# Altium PCB PeSCA_PCB.PcbDoc
Units mil, origin at the board's own origin, x right, y up, seen from the top; angles counter-clockwise.
Board outline 1968.47 x 1968.47 mil, 2 copper layers (Top Layer, Bottom Layer), stack 61.756 mil thick; 61 components, 33 nets, 166 pads, 123 vias.
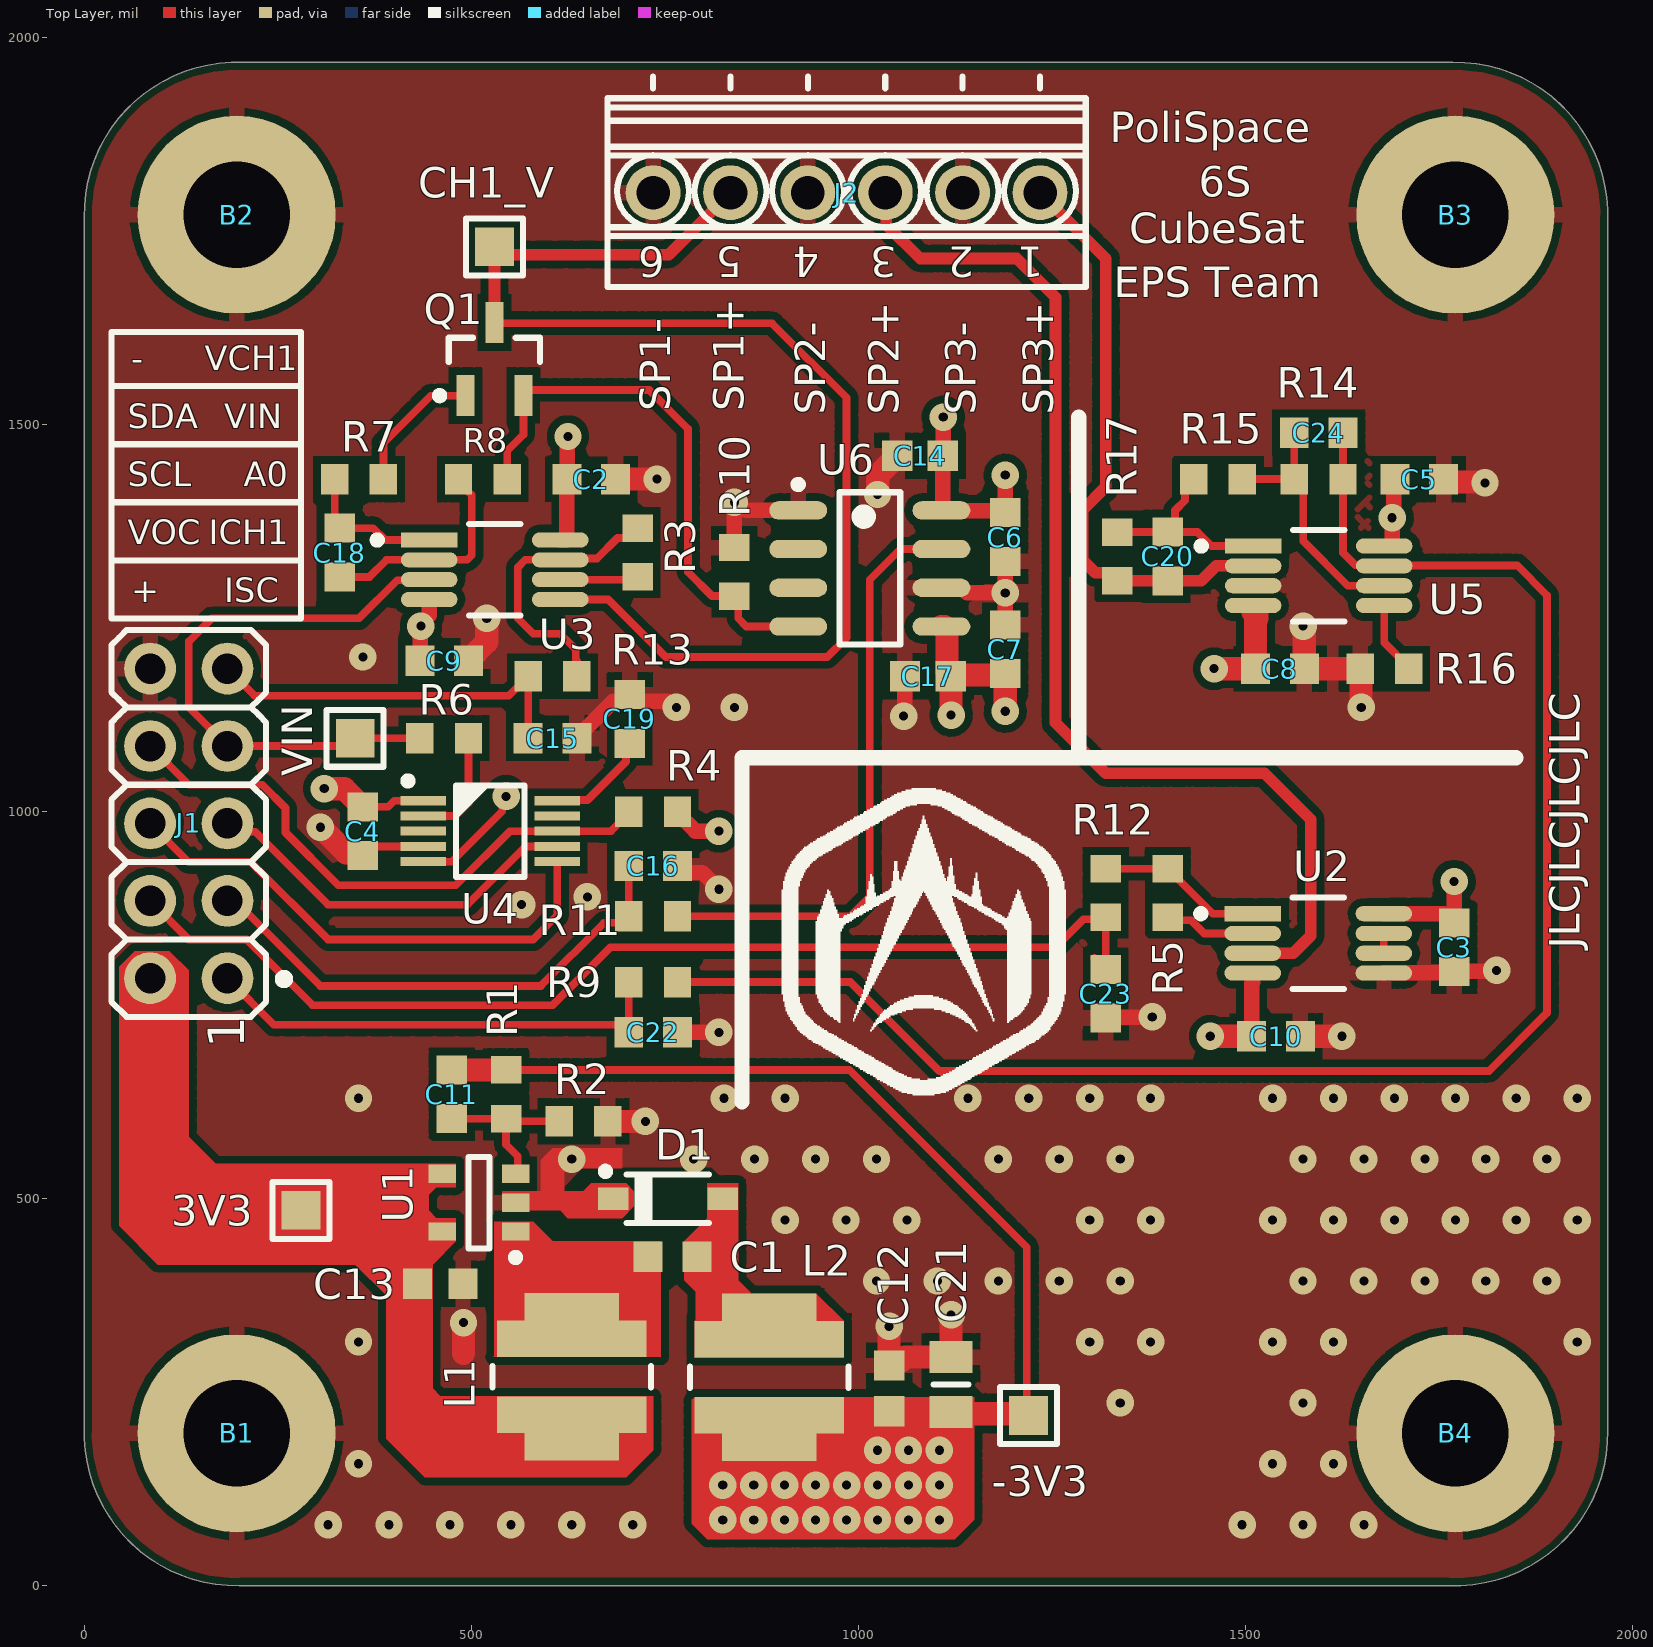
[diagram p0: Top Layer view]
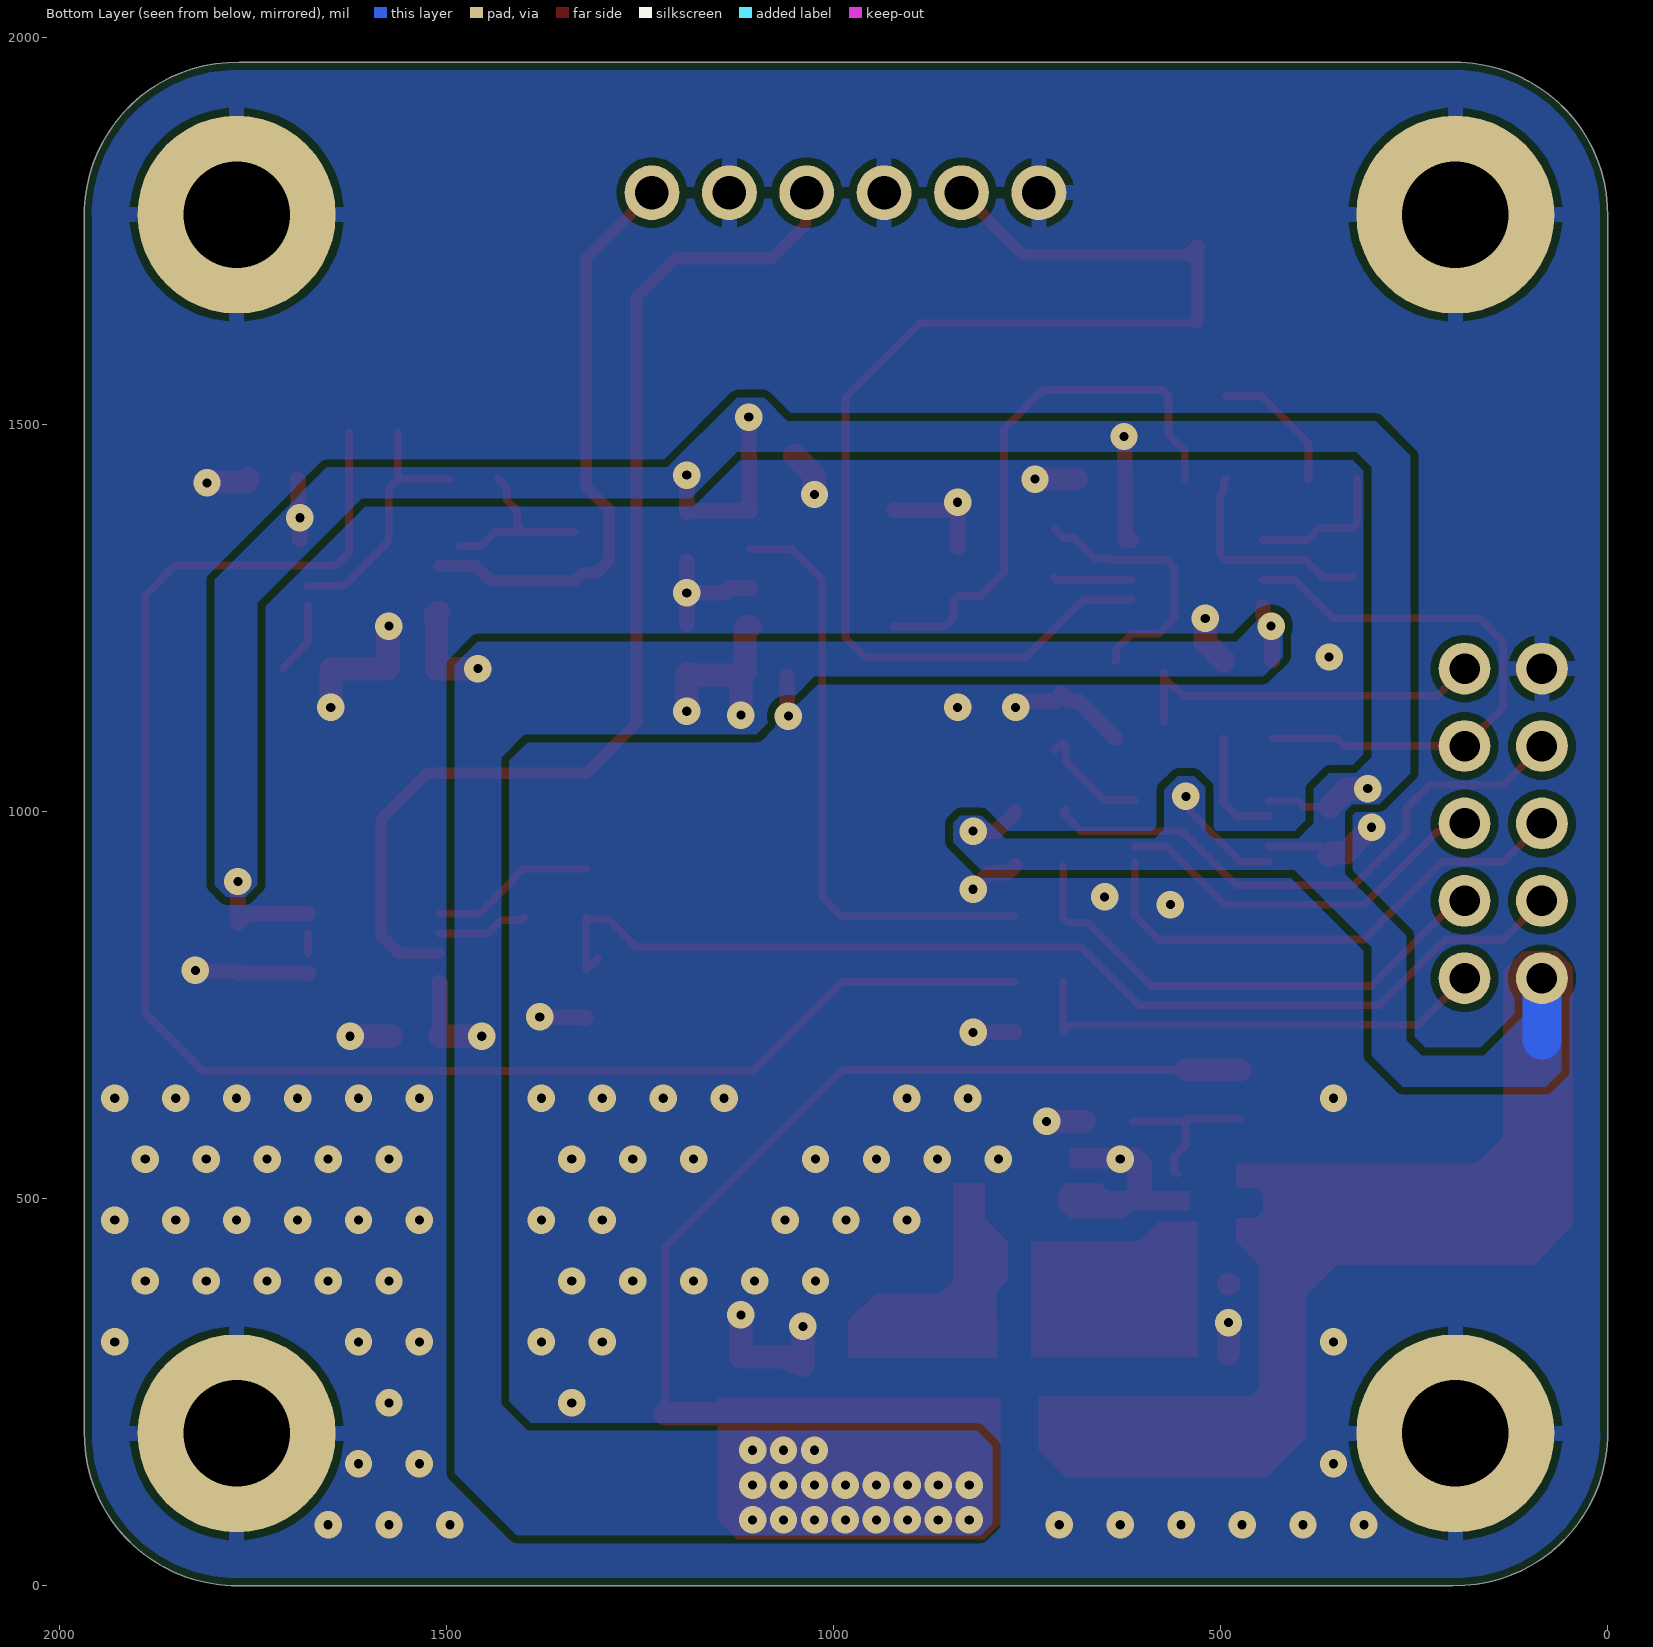
[diagram p1: Bottom Layer view, seen from below]
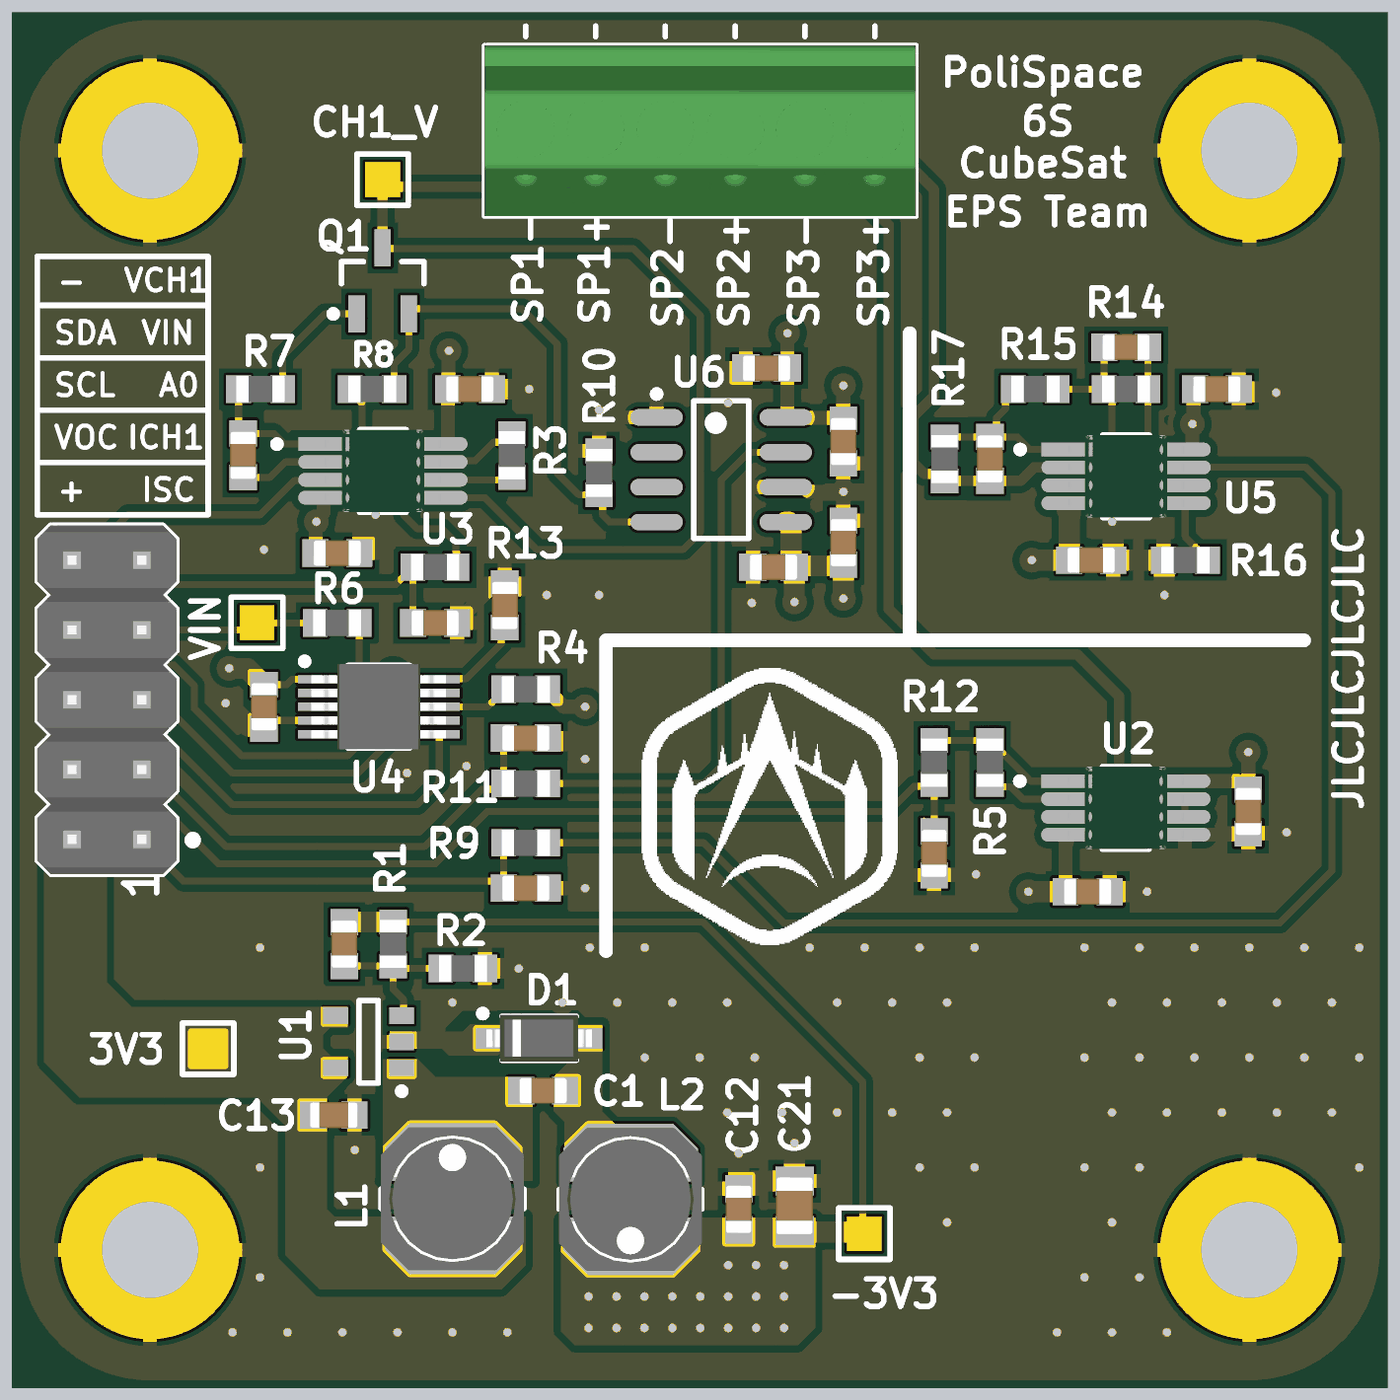
[diagram p2: 3D render of the assembled board from above, using the file's embedded part models]

## Layer stack, top to bottom
Top Solder: solder mask 0.4, Solder Resist, Dk 3.5
Top Layer: signal copper 1.378
Dielectric 2: core 59, Core-043, Dk 4.3
Bottom Layer: signal copper 1.378
Bottom Solder: solder mask 0.4, Solder Resist, Dk 3.5

## Board outline
200,0.02 cw(c196.85,196.85) 0.16,204.99 0.02,205.14 0.03,1768.52 cw(c196.84,1771.67) 204.98,1968.33 204.99,1968.34 205.14,1968.49 1768.5,1968.49 cw(c1771.65,1771.65) 1968.34,1763.51 1968.49,1763.37 1968.49,200 cw(c1771.65,196.85) 1763.51,0.16 1763.37,0.02

## Design rules (kind name [scope] priority, off if disabled: settings)
BoardOutlineClearance [All] p1: gap=10 ignorepadtopadclearanceinfootprint=FALSE except(0: Arc-SplitContinuation Track-SplitContinuation SMDPad-SplitContinuation THPad-SplitContinuation Via-SplitContinuation Fill-SplitContinuation Poly-SplitContinuation Region-SplitContinuation Text-SplitContinuation)
Clearance Exception [IsPad AND InComponentClass('Eccezioni')] p1: gap=10 ignorepadtopadclearanceinfootprint=FALSE except(0: SMDPad-Hole THPad-Hole Via-Hole Fill-Hole Poly-Hole Region-Hole Text-Hole; 5: Arc-Arc Arc-Track Arc-SMDPad Track-Track Track-SMDPad SMDPad-SMDPad; 12.99: Arc-Hole Track-Hole; 19.68: THPad-THPad)
Clearance [All] p2: gap=10 ignorepadtopadclearanceinfootprint=FALSE except(0: SMDPad-Hole THPad-Hole Via-Hole Fill-Hole Poly-Hole Region-Hole Text-Hole; 5: Arc-Arc Arc-Track Track-Track SMDPad-SMDPad; 12.99: Arc-Hole Track-Hole; 19.68: THPad-THPad)
HoleSize [All] p1: absolutevalues=TRUE maxlimit=236.22 minlimit=7.87 maxpercent=80.000 minpercent=20.000
MinimumAnnularRing [All] p1: minimumring=11.81
MinimumSolderMaskSliver [All] p1: minsoldermaskwidth=3.94
PlaneConnect [All] p1: pad.planeconnectstyle=Relief pad.reliefexpansion=20 pad.reliefentries=4 pad.reliefconductorwidth=10 pad.reliefairgap=10 via.planeconnectstyle=Direct via.reliefexpansion=20 via.reliefentries=4 via.reliefconductorwidth=10 via.reliefairgap=10
PolygonConnect [All] p1: thpad.connectstyle=Relief thpad.reliefconductorwidth=20 thpad.reliefentries=4 thpad.polygonreliefangle="90 Angle" thpad.airgapwidth=10 smdpad.connectstyle=Relief smdpad.reliefconductorwidth=20 smdpad.reliefentries=4 smdpad.polygonreliefangle="90 Angle" smdpad.airgapwidth=10 via.connectstyle=Direct via.reliefconductorwidth=20 via.reliefentries=4 via.polygonreliefangle="90 Angle" via.airgapwidth=10
RoutingVias [All] p1: holewidth=28 width=50 viastyle="Through Hole" minholewidth=28 minwidth=50 maxholewidth=28 maxwidth=50
SilkToSilkClearance [All] p1: silktosilkclearance=3.94
SilkToSolderMaskClearance [IsPad] p1: minsilkscreentomaskgap=3.15 clearancetoexposedcopper=TRUE
SolderMaskExpansion [All] p1: expansion=4 istentingtop=FALSE
Width [All] p1: maxlimit=100 minlimit=10 preferedwidth=30
25 further rules are at their usual default settings.

## Classes and differential pairs
component class Eccezioni: U1 U2 U3 U4 U5 U6

## Components (designator, comment, footprint, x,y, rotation, side; value= is the part's Value field where it differs from the comment)
3V3 "Test Point" TPS127 280,485 r0 top (schematic designator TP2)
-3V3 "Test Point" TPS127 1220,220 r0 top (schematic designator TP1)
B1 "Plated Hole" MTG350_650 196.85,196.85 r0 top
B2 "Plated Hole" MTG350_650 196.85,1771.65 r0 top
B3 "Plated Hole" MTG350_650 1771.65,1771.65 r0 top
B4 "Plated Hole" MTG350_650 1771.65,196.85 r0 top
C1 "470nF" CAPC1608X87N 760,425 r0 top
C2 "100nF" CAPC1608X87N 655,1430 r180 top
C3 "100nF" CAPC1608X87N 1770,825 r90 top
C4 "100nF" CAPC1608X87N 360,975 r90 top
C5 "100nF" CAPC1608X87N 1725,1430 r180 top
C6 "100nF" CAPC1608X87N 1190,1355 r90 top
C7 "100nF" CAPC1608X87N 1190,1210 r270 top
C8 "100nF" CAPC1608X87N 1545,1185 r180 top
C9 "100nF" CAPC1608X87N 465,1195 r180 top
C10 "100nF" CAPC1608X87N 1540,710 r180 top
C11 "100pF" CAPC1608X87N 475,635 r90 top
C12 "10uF" CAPC1608X80N 1040,255 r270 top
C13 "4.7uF" CAPC1709X95N 460,390 r180 top
C14 "10uF" CAPC1608X80N 1080,1460 r0 top
C15 "100pF" CAPC1608X87N 605,1095 r180 top
C16 "100pF" CAPC1608X87N 735,930 r180 top
C17 "10uF" CAPC1608X80N 1090,1175 r0 top
C18 "100nF" CAPC1608X87N 330,1335 r90 top
C19 "470nF" CAPC1608X87N 705,1120 r90 top
C20 "100nF" CAPC1608X87N 1400,1330 r270 top
C21 "10uF" CAPC2012X135N 1120,260 r270 top
C22 "470nF" CAPC1608X87N 735,715 r180 top
C23 "470nF" CAPC1608X87N 1320,765 r90 top
C24 "100nF" CAPC1608X87N 1595,1490 r180 top
CH1_V "Test Point" TPS127 530,1730 r0 top (schematic designator TP3)
D1 "MBR0520L-TP" SOD3715X135N 754.13,500 r0 top
J1 "Header 10" HARWIN_M20-9980546 135,985 r90 top
J2 "" PHOENIX_1725698 985,1800 r180 top
L1 "10uH" IND_TDK_VLCF5020-1 630,270 r90 top
L2 "10uH" IND_TDK_VLCF5020-1 885,269.21 r270 top
Q1 "BSS806N" INF-PG-SOT23_M 530,1585 r90 top
R1 "34k" RESC1608X55N 545,635 r90 top
R2 "21k" RESC1608X55N 645,600 r180 top
R3 "0" RESC1608X55N 715,1335 r90 top
R4 "4k7" RESC1608X55N 735,1000 r0 top
R5 "0" RESC1608X55N 1400,895 r90 top
R6 "0" RESC1608X55N 465,1095 r180 top
R7 "0" RESC1608X55N 355,1430 r0 top
R8 "0" RESC1608X55N 515,1430 r0 top
R9 "200" RESC1608X55N 735,780 r0 top
R10 "100" RESC1608X55N 840,1310 r270 top
R11 "200" RESC1608X55N 735,865 r0 top
R12 "200" RESC1608X55N 1320,895 r90 top
R13 "200" RESC1608X55N 605,1175 r0 top
R14 "21k" RESC1608X55N 1595,1430 r0 top
R15 "21k" RESC1608X55N 1465,1430 r0 top
R16 "10k" RESC1608X55N 1680,1185 r0 top
R17 "1k" RESC1608X55N 1335,1330 r90 top
U1 "LT1617ES5#TRMPBF" LT-S5-5-SOT-23_L 510,495 r180 top
U2 "OPA2202IDGKT" FP-DGK0008A-IPC_A 1594.53,830 r0 top
U3 "OPA2202IDGKT" FP-DGK0008A-IPC_A 530.32,1312.8 r0 top
U4 "DAC60501ZDGSR" SOP50P490X110-10N 524.53,975 r0 top
U5 "OPA2202IDGKT" FP-DGK0008A-IPC_A 1595,1305 r0 top
U6 "AD8228ARZ" ADI-R-8_L 1015,1314.53 r0 top
VIN "Test Point" TPS127 350,1095 r0 top (schematic designator TP4)

## Footprints (in the part's own frame and the unit in brackets; to place one, negate y for a bottom-side part, rotate by r counter-clockwise, add the part's x,y. Pads: shape width x height; smd on the part's side, far side on the other; paste and mask are expansions set on the pad)
ADI-R-8_L [mm] "SOIC, 8-Leads, Body 4.9x3.9mm, Pitch 1.27mm, IPC High Density"
  oval 1.9x0.6 smd: 1(-2.35,1.905) 2(-2.35,0.635) 3(-2.35,-0.635) 4(-2.35,-1.905) 5(2.35,-1.905) 6(2.35,-0.635) 7(2.35,0.635) 8(2.35,1.905)
  silkscreen extent -2.47,-2.5 1,2.88, body extent -2,-2.5 2,2.5, height 1.75
CAPC1608X80N [mm] "Chip Capacitor, Body 1.6x0.8mm IPC Medium Density"
  rect 1x1 smd: 1(-0.75,0) 2(0.75,0)
  body extent -0.87,-0.47 0.88,0.48, height 0.8
CAPC1608X87N [mm] "Chip Capacitor, Body 1.6x0.8mm IPC Medium Density"
  rect 0.95x1 smd: 1(-0.8,0) 2(0.8,0)
  body extent -0.87,-0.47 0.88,0.48, height 0.87
CAPC1709X95N [mm] "Capacitor, non-Polarized, Chip; 1.65mm L X 0.85mm W X 0.95mm H,IPC Medium Density"
  rect 0.95x1 smd: 1(-0.75,0) 2(0.75,0)
  body extent -0.87,-0.47 0.88,0.48, height 0.95
CAPC2012X135N [mm] "Chip Capacitor, Body 2.0x1.25mm, IPC Medium Density"
  rect 1.05x1.4 smd: 1(-0.9,0) 2(0.9,0)
  silkscreen extent 0,-0.58 0,0.58, body extent -1.05,-0.67 1.05,0.68, height 1.25
FP-DGK0008A-IPC_A [mm]
  rect 1.857x0.498 smd paste+0 mask+0: 1(-2.151,0.975)
  rrect100% 1.857x0.498 smd paste+0 mask+0: 2(-2.151,0.325) 3(-2.151,-0.325) 4(-2.151,-0.975) 5(2.151,-0.975) 6(2.151,-0.325) 7(2.151,0.325) 8(2.151,0.975)
  silkscreen extent -3.98,-1.5 0.85,1.5, body extent -3.58,-2 3.58,2, height 0.25
HARWIN_M20-9980546 [mm] "10 Contacts - Pitch 2.54mm - Dual Row Straight Header (Lead Length 6.1mm, Insulator 2.54mm)"
  round 1.7 hole 1: 1(-5.08,-1.27) 2(-5.08,1.27) 3(-2.54,-1.27) 4(-2.54,1.27) 5(0,-1.27) 6(0,1.27) 7(2.54,-1.27) 8(2.54,1.27) 9(5.08,-1.27) 10(5.08,1.27)
  silkscreen extent -6.35,-3.27 6.35,2.54, body extent -6.35,-2.54 6.35,2.54, height 8.64
IND_TDK_VLCF5020-1 [mm] "SMD Inductor, 5mm L X 5mm W X 2mm H, TDK VLCF5020-1 Case"
  rect 0.9x3.1 smd: 1(-2.3,0) 2(2.3,0)
  rect 1.2x4.9 smd: 1(-1.25,0) 2(1.25,0)
  Top Layer region: 2.75,1.55 1.85,2.45 0.65,2.45 0.65,-2.45 1.85,-2.45 2.75,-1.55
  Top Layer region: -2.75,-1.55 -1.85,-2.45 -0.65,-2.45 -0.65,2.45 -1.85,2.45 -2.75,1.55
  silkscreen extent -0.35,-2.6 0.35,2.6, body extent -2.6,-2.6 2.6,2.6, height 2
INF-PG-SOT23_M [mm] "SOT23, 3-Leads, Body 2.9x1.3mm, Pitch 0.95mm, IPC Low Density"
  rect 1.35x0.6 smd: 1(-1.2,0.95) 2(-1.2,-0.95) 3(1.2,0)
  silkscreen extent -1.32,-1.5 0.7,1.92, body extent -0.7,-1.5 0.7,1.5, height 1.1
LT-S5-5-SOT-23_L [mm] "SOT23, 5-Leads, Body 3x1.75mm, Pitch 0.95mm, IPC High Density"
  rect 0.9x0.6 smd: 1(-1.2,0.95) 2(-1.2,0) 3(-1.2,-0.95) 4(1.2,-0.95) 5(1.2,0.95)
  silkscreen extent -1.33,-1.5 0.35,1.92, body extent -0.87,-1.5 0.87,1.5, height 1.45
MTG350_650 [mm] "Plated Through Hole: Hole Dia.=3.5mm Pad Dia.=6.5mm"
  round 6.5 hole 3.5: 1(0,0)
PHOENIX_1725698 [mm] "Micro PCB Terminal Block, Pitch 2.54mm, 6 Positions, Screw Connection"
  round 1.8 hole 1.1: 1(-6.35,0) 2(-3.81,0) 3(-1.27,0) 4(1.27,0) 5(3.81,0) 6(6.35,0)
  silkscreen extent -7.85,-3.81 7.85,3.1, body extent -7.85,-3.1 7.85,3.1, height 8.5
RESC1608X55N [mm] "Chip Resistor, EIA 0603, Metric 1608, Body 1.6x0.8mm, IPC Medium Density"
  rect 0.9x1 smd: 1(-0.8,0) 2(0.8,0)
  body extent -0.87,-0.47 0.88,0.48, height 0.55
SOD3715X135N [mm] "SOD Diode (SOD-123); 2.70mm W X 1.55mm L X 1.35mm H body, IPC Medium Density"
  rect 1x0.75 smd: 1(-1.8,0) 2(1.8,0)
  silkscreen extent -2.17,-0.8 1.35,1.02, body extent -1.92,-0.85 1.93,0.85, height 1.35
SOP50P490X110-10N [mm] "MSOP, 10-Leads, Body 3.1x3.1mm (max), Pitch 0.50mm, IPC Medium Density"
  rect 1.5x0.3 smd: 1(-2.2,1) 2(-2.2,0.5) 3(-2.2,0) 4(-2.2,-0.5) 5(-2.2,-1) 6(2.2,-1) 7(2.2,-0.5) 8(2.2,0) 9(2.2,0.5) 10(2.2,1)
  silkscreen extent -2.82,-1.5 1.12,1.77, body extent -2.45,-1.55 2.45,1.55, height 1.1
TPS127 [mil] "1.27 x  1.27mm SMD Test Point Area"
  rect 50x50 smd paste-50: 1(0,0)
  silkscreen extent -37,-37 37,37

## Part data
3V3 -3V3 CH1_V VIN: library part SMD_PAD_1.27X1.27MM, Author="CERN DEM JLC", Component Type="Standard (No BOM)", ComponentHeight=0mm, CreateDate=12-Jan-08, Family="Test Point", HelpURL=Undefined, LatestRevisionDate=12-Jan-08, Mounted=No, PackageDescription="1.27mm x 1.27mm PCB Copper Area (SMD Test Point)", Part Description="1.27mm x 1.27mm PCB Copper Area (SMD Test Point)", Part Number=SMD_PAD_1.27X1.27MM, Pin Count=1, Sense=No, SMD=No, Socket=No, Status=None
B1 B2 B3 B4: library part PLATED_HOLE3.5_PAD6.5, "Single Terminal Socket", Author="CERN DEM JLC", Component Type="Standard (No BOM)", ComponentHeight=0mm, CreateDate=20-Nov-08, Family="Plated Hole", HelpURL=Undefined, LatestRevisionDate=23-Nov-11, Mounted=No, PackageDescription="Plated Through Hole: Hole Dia.=3.5mm Pad Dia.=6.5mm", Part Description="Plated Through Hole: Hole Dia.=3.5mm Pad Dia.=6.5mm", Part Number=PLATED_HOLE3.5_PAD6.5, Pin Count=1, Sense=No, SMD=No, Socket=No, Status=None
C1 C19 C22 C23: library part CC0603_470NF_50V_10%_X5R, "Non-polarised capacitor", Case=0603, Manufacturer=GENERIC, Manufacturer1 ComponentHeight=0.9mm, Manufacturer1 Example=TDK, Manufacturer1 Part Number=C1608X5R1H474K080, Tolerance=±10%, Voltage=50V, Author="CERN DEM MR", Component Type=Standard, CreateDate=29-Feb-16, HelpURL=\\cern.ch\dfs\Applications\Altium\Datasheets\CC0603_X5R_TDK_C.pdf, LatestRevisionDate=29-Feb-16, Manufacturer Part Number=CC0603_470NF_50V_10%_X5R, Mounted=Yes, Part Description="SMD Multilayer Chip Ceramic Capacitor", Part Number=CC0603_470NF_50V_10%_X5R, Pin Count=2, Sense=No, SMD=Yes, Socket=No, Status=None, TC=X5R
C2 C3 C4 C5 C6 C7 C8 C9 C10 C18 C20 C24: library part CC0603_100NF_50V_10%_X7R, "Non-polarised capacitor", Case=0603, Manufacturer=GENERIC, Manufacturer1 ComponentHeight=0.87mm, Manufacturer1 Example=PHYCOMP, Manufacturer1 Part Number=223858615649, Tolerance=±10%, Voltage=50V, Author="CERN DEM JLC", Component Type=Standard, CreateDate=03-Dec-07, HelpURL=\\cern.ch\dfs\Applications\Altium\Datasheets\CC0603_X7R_PHYCOMP.pdf, LatestRevisionDate=03-Dec-07, Manufacturer Part Number=CC0603_100NF_50V_10%_X7R, Mounted=Yes, Part Description="SMD Multilayer Chip Ceramic Capacitor", Part Number=CC0603_100NF_50V_10%_X7R, Pin Count=2, Sense=No, SMD=Yes, Socket=No, Status=Preferred, TC=X7R
C11 C15 C16: library part CC0603_100PF_50V_10%_X7R, "Non-polarised capacitor", Case=0603, Manufacturer=GENERIC, Manufacturer1 ComponentHeight=0.9mm, Manufacturer1 Example=PHYCOMP, Manufacturer1 Part Number=223858615609, Tolerance=±10%, Voltage=50V, Author="CERN DEM JLC", Component Type=Standard, CreateDate=15-Aug-12, HelpURL=\\cern.ch\dfs\Applications\Altium\Datasheets\CC0603_X7R_PHYCOMP.pdf, LatestRevisionDate=15-Aug-12, Manufacturer Part Number=CC0603_100PF_50V_10%_X7R, Mounted=Yes, Part Description="SMD Multilayer Chip Ceramic Capacitor", Part Number=CC0603_100PF_50V_10%_X7R, Pin Count=2, Sense=No, SMD=Yes, Socket=No, Status=Preferred, TC=X7R
C12 C14 C17: library part CC0603_10UF_16V_20%_X5R, "Non-polarised capacitor", Case=0603, Manufacturer=GENERIC, Manufacturer1 ComponentHeight=0.8mm, Manufacturer1 Example=MURATA, Manufacturer1 Part Number=GRM188R61C106MA73D, Tolerance=±20%, Voltage=16V, Author="CERN DEM MR", Component Type=Standard, CreateDate=02-Mar-16, HelpURL=\\cern.ch\dfs\Applications\Altium\Datasheets\CC0603_X5R_MURATA_GRM.pdf, LatestRevisionDate=02-Mar-16, Manufacturer Part Number=CC0603_10UF_16V_20%_X5R, Mounted=Yes, Part Description="SMD Multilayer Chip Ceramic Capacitor", Part Number=CC0603_10UF_16V_20%_X5R, Pin Count=2, Sense=No, SMD=Yes, Socket=No, Status=None, TC=X5R
C13: library part CC0603_4.7UF_16V_10%_X5R, "Non-polarised capacitor", Case=0603, Manufacturer=GENERIC, Manufacturer1 ComponentHeight=0.95mm, Manufacturer1 Example="TAIYO YUDEN", Manufacturer1 Part Number=EMK107ABJ475KA-T, Tolerance=±10%, Voltage=16V, Author="CERN DEM JLC", Component Type=Standard, CreateDate=16-Dec-13, HelpURL=\\cern.ch\dfs\Applications\Altium\Datasheets\CC0603_X7R_TAIYO-YUDEN_HIGH-VALUE.pdf, LatestRevisionDate=16-Sep-14, Manufacturer Part Number=CC0603_4.7UF_16V_10%_X5R, Mounted=Yes, Part Description="SMD Multilayer Chip Ceramic Capacitor", Part Number=CC0603_4.7UF_16V_10%_X5R, Pin Count=2, Sense=No, SMD=Yes, Socket=No, Status=None, TC=X5R
C21: library part CC0805_10UF_16V_10%_X5R, "Non-polarised capacitor", Case=0805, Manufacturer=GENERIC, Manufacturer1 ComponentHeight=1.4mm, Manufacturer1 Example=KEMET, Manufacturer1 Part Number=C0805C106K4PAC, Tolerance=±10%, Voltage=16V, Author="CERN DEM JLC", Component Type=Standard, CreateDate=03-Dec-07, HelpURL=\\cern.ch\dfs\Applications\Altium\Datasheets\CC1206_X5R_KEMET.pdf, LatestRevisionDate=03-Dec-07, Manufacturer Part Number=CC0805_10UF_16V_10%_X5R, Mounted=Yes, Part Description="SMD Multilayer Chip Ceramic Capacitor", Part Number=CC0805_10UF_16V_10%_X5R, Pin Count=2, Sense=No, SMD=Yes, Socket=No, Status=Preferred, TC=X5R
D1: "Diode Schottky 20V 0.5A 2-Pin SOD-123 T/R", Average Rectified Current=500mA, Capacitance=30pF, Forward Voltage=450mV, Manufacturer=MCC, Manufacturer Part Number=MBR0520-TP, Max Forward Surge Current (Ifsm)=5.5A, Max Operating Temperature=150°C, Max Repetitive Reverse Voltage (Vrrm)=20V, Max Reverse Current=200uA, Min Operating Temperature=-55°C, Package Quantity=1, Supplier Part Number 1=7013061, Category="Schottky Diodes", ComponentLink1Description=https://datasheet.ciiva.com/23684/1699590-23684328.pdf?src-supplier=Newark, ComponentLink1URL=https://datasheet.ciiva.com/23684/1699590-23684328.pdf?src-supplier=Newark, ComponentLink2Description=https://datasheet.ciiva.com/15200/getdatasheetpartid-202300-15200502.pdf?src-supplier=Verical, ComponentLink2URL=https://datasheet.ciiva.com/15200/getdatasheetpartid-202300-15200502.pdf?src-supplier=Verical, ComponentLink3Description=https://datasheet.ciiva.com/912/mbr0520mbr0580sod123-912327.pdf?src-supplier=Digi-Key, ComponentLink3URL=https://datasheet.ciiva.com/912/mbr0520mbr0580sod123-912327.pdf?src-supplier=Digi-Key, ComponentLink4Description=https://datasheet.ciiva.com/912/mbr0520mbr0580sod123-912328.pdf?src-supplier=Digi-Key, ComponentLink4URL=https://datasheet.ciiva.com/912/mbr0520mbr0580sod123-912328.pdf?src-supplier=Digi-Key, ComponentLink5Description=https://datasheet.ciiva.com/912/mbr0520mbr0580sod123-912329.pdf?src-supplier=Digi-Key, ComponentLink5URL=https://datasheet.ciiva.com/912/mbr0520mbr0580sod123-912329.pdf?src-supplier=Digi-Key, ComponentLink6Description=https://datasheet.ciiva.com/7963/1699590-7963290.pdf?src-supplier=Element14, ComponentLink6URL=https://datasheet.ciiva.com/7963/1699590-7963290.pdf?src-supplier=Element14, ComponentLink7Description=https://datasheet.ciiva.com/28381/1699590-28381979.pdf?src-supplier=Element14, ComponentLink7URL=https://datasheet.ciiva.com/28381/1699590-28381979.pdf?src-supplier=Element14, Current Rating=500mA, Element Configuration=Single, Forward Current=500mA, Lead Free="Lead Free", Max Reverse Voltage (DC)=20V, Mount="Surface Mount", Number of Pins=2, Output Current=500mA, Packaging="Tape and Reel", Peak Non-Repetitive Surge Current=5.5A, Polarity=Standard, Pricing 1="3000=0.06080, 9000=0.05070, 15000=0.05020, 45000=0.04910, 75000=0.04860 (USD)", Radiation Hardening=No, REACH SVHC=Unknown, RoHS=Yes, RoHS Compliant=Yes, Series=MBR0520, Stock 1=3000, Supplier 1="Future Electronics", Voltage Rating (DC)=20V
J1: library part HARWIN_M20-9980546, "Connector 10 Male", Manufacturer=HARWIN, Manufacturer Part Number=M20-9980546, Author="CERN DEM MR", Component Type=Standard, ComponentHeight=8.64mm, CreateDate=15-Sep-17, Family="Header 10", HelpURL=\\cern.ch\dfs\Applications\Altium\Datasheets\HARWIN_M20-9980546.pdf, LatestRevisionDate=15-Sep-17, Mounted=Yes, Part Description="10 Contacts - Pitch 2.54mm - Dual Row Straight Header (Lead Length 6.1mm, Insulator 2.54mm)", Part Number=HARWIN_M20-9980546, Pin Count=10, PressFit=No, Sense=No, SMD=No, Socket=No, Status=None
J2: library part PHOENIX_1725698, "Terminal Block, 6 Positions, Screw Connection", Manufacturer="PHOENIX CONTACT", Manufacturer Part Number="1725698 (MPT 0,5/6-2,54)", Author="CERN DEM JMW", Component Type=Standard, ComponentHeight=8.5mm, CreateDate=07-Nov-08, HelpURL=\\cern.ch\dfs\Applications\Altium\Datasheets\PHOENIX_1725698.pdf, LatestRevisionDate=26-Apr-10, Mounted=Yes, Part Description="6A, 63V, Terminal Block, Pitch 2.54mm, 6 Positions, Screw Connection", Part Number=PHOENIX_1725698, Pin Count=6, PressFit=No, Sense=No, SMD=No, Socket=No, Status=None
L1 L2: library part IND_10UH_20%_TDK_VLCF5020-1, "Inductor With Core", Manufacturer=TDK, Manufacturer Part Number=VLCF5020T-100M1R1-1, Power=1.5A, Resistance=0.198R, Tolerance=±20%, Author="CERN DEM JLC", Component Type=Standard, ComponentHeight=2mm, CreateDate=10-Jul-14, HelpURL=\\cern.ch\dfs\Applications\Altium\Datasheets\IND_TDK_VLCF.pdf, LatestRevisionDate=10-Jul-14, Mounted=Yes, Part Description="SMD Inductor for Power Circuits (Wound/STD , Magnetic Shielded), VLCF series", Part Number=IND_10UH_20%_TDK_VLCF5020-1, Pin Count=2, Sense=No, SMD=Yes, Socket=No, Status=None
Q1: library part CMP-1149-00036-1, "N-Channel OptiMOS 2 Small-Signal-Transistor, 20 V VDS, 2.3 A ID, -55 to 150 degC, PG-SOT23, Reel, Green", Manufacturer=Infineon, ComponentLink1Description="Manufacturer URL", ComponentLink1URL=http://www.infineon.com/, ComponentLink2Description=Datasheet, ComponentLink2URL=http://www.infineon.com/dgdl/BSS806N_Rev2.3_.pdf?folderId=db3a3043156fd573011622e10b5c1f67&fileId=db3a304330f686060131185f0553451c, ComponentLink3Description="Package Specification", ComponentLink3URL=http://www.infineon.com/dgdl/SOT23-Package_Overview.pdf?folderId=db3a30431936bc4b0119532290053c66&fileId=db3a30431936bc4b0119533468123c85, DatasheetVersion="Rev. 2.3", Green=TRUE, Halogen-free=TRUE, ID (max)="2.3Â A", IDpuls (max)="9.3Â A", Mounting Technology="Surface Mount", PackageDescription="3-Pin Small Outline Transistor Package, 2.9 x 1.3 mm Body, 0.95 mm Pitch", PackageReference=PG-SOT23, PackageVersion=Apr-08, Packing=Reel, PartNumber=BSS806N, Ptot (max)="0.5Â W", QG="1.7Â nC", RDS (on) (max)="57 mOhm", RDS (on) (max) (@1.8V)="82 mOhm", RDS (on) (max) (@2.5V)="57 mOhm", RthJA (max)="250 K/W", VDS (max)="20 V", VGS(th) (max)="0.75Â V", VGS(th) (min)="0.3Â V"
R1: library part R0603_34K_0.1%_0.063W_10PPM, "Resistor - 0.1%", Case=0603, Manufacturer=GENERIC, Manufacturer1 ComponentHeight=0.5mm, Manufacturer1 Example="TYCO HOLSWORTHY", Manufacturer1 Part Number=RN73C1J34KBTDF, Power=0.063W, Tolerance=±0.1%, Author="CERN DEM JLC", Component Type=Standard, CreateDate=03-Dec-07, HelpURL=\\cern.ch\dfs\Applications\Altium\Datasheets\R0603_Tyco_RN73.pdf, LatestRevisionDate=13-Mar-08, Manufacturer Part Number=R0603_34K_0.1%_0.063W_10PPM, Mounted=Yes, Part Description="Thin Film Chip Resistor", Part Number=R0603_34K_0.1%_0.063W_10PPM, Pin Count=2, PressFit=No, Sense=No, SMD=Yes, Socket=No, Status="Not Recommended", TC=±10ppm
R2 R14 R15: library part R0603_21K_0.1%_0.063W_10PPM, "Resistor - 0.1%", Case=0603, Manufacturer=GENERIC, Manufacturer1 ComponentHeight=0.5mm, Manufacturer1 Example="TYCO HOLSWORTHY", Manufacturer1 Part Number=RN73C1J21KBTDF, Power=0.063W, Tolerance=±0.1%, Author="CERN DEM JLC", Component Type=Standard, CreateDate=03-Dec-07, HelpURL=\\cern.ch\dfs\Applications\Altium\Datasheets\R0603_Tyco_RN73.pdf, LatestRevisionDate=13-Mar-08, Manufacturer Part Number=R0603_21K_0.1%_0.063W_10PPM, Mounted=Yes, Part Description="Thin Film Chip Resistor", Part Number=R0603_21K_0.1%_0.063W_10PPM, Pin Count=2, PressFit=No, Sense=No, SMD=Yes, Socket=No, Status="Not Recommended", TC=±10ppm
R3 R5 R6 R7 R8: library part R0603_0R_JUMPER, "Resistor", Case=0603, Manufacturer=GENERIC, Manufacturer1 ComponentHeight=0.55mm, Manufacturer1 Example="NIC COMPONENT", Manufacturer1 Part Number=NRC06Z0, Author="CERN DEM JLC", Component Type=Standard, CreateDate=03-Dec-07, HelpURL=\\cern.ch\dfs\Applications\Altium\Datasheets\R0603_NIC_NRC.pdf, LatestRevisionDate=13-Mar-08, Manufacturer Part Number=R0603_0R_JUMPER, Mounted=Yes, Part Description="1A (0.05R Max DC Resistance) Zero Ohm Jumper", Part Number=R0603_0R_JUMPER, Pin Count=2, PressFit=No, Sense=No, SMD=Yes, Socket=No, Status=Preferred
R4: library part R0603_4K7_1%_0.1W_100PPM, "Resistor - 1%", Case=0603, Manufacturer=GENERIC, Manufacturer1 ComponentHeight=0.55mm, Manufacturer1 Example="NIC COMPONENT", Manufacturer1 Part Number=NRC06F4701TRF, Power=0.1W, Tolerance=±1%, Author="CERN DEM JLC", Component Type=Standard, CreateDate=03-Dec-07, HelpURL=\\cern.ch\dfs\Applications\Altium\Datasheets\R0603_NIC_NRC.pdf, LatestRevisionDate=13-Mar-08, Manufacturer Part Number=R0603_4K7_1%_0.1W_100PPM, Mounted=Yes, Part Description="General Purpose Thick Film Chip Resistor", Part Number=R0603_4K7_1%_0.1W_100PPM, Pin Count=2, PressFit=No, Sense=No, SMD=Yes, Socket=No, Status=Preferred, TC=±100ppm/°C
R9 R11 R12 R13: library part R0603_200R_1%_0.1W_100PPM, "Resistor - 1%", Case=0603, Manufacturer=GENERIC, Manufacturer1 ComponentHeight=0.55mm, Manufacturer1 Example="NIC COMPONENT", Manufacturer1 Part Number=NRC06F2000TRF, Power=0.1W, Tolerance=±1%, Author="CERN DEM JLC", Component Type=Standard, CreateDate=03-Dec-07, HelpURL=\\cern.ch\dfs\Applications\Altium\Datasheets\R0603_NIC_NRC.pdf, LatestRevisionDate=13-Mar-08, Manufacturer Part Number=R0603_200R_1%_0.1W_100PPM, Mounted=Yes, Part Description="General Purpose Thick Film Chip Resistor", Part Number=R0603_200R_1%_0.1W_100PPM, Pin Count=2, PressFit=No, Sense=No, SMD=Yes, Socket=No, Status=Preferred, TC=±100ppm/°C
R10: library part R0603_100R_0.1%_0.063W_10PPM, "Resistor - 0.1%", Case=0603, Manufacturer=GENERIC, Manufacturer1 ComponentHeight=0.5mm, Manufacturer1 Example="TYCO HOLSWORTHY", Manufacturer1 Part Number=RN73C1J100RBTDF, Power=0.063W, Tolerance=±0.1%, Author="CERN DEM JLC", Component Type=Standard, CreateDate=03-Dec-07, HelpURL=\\cern.ch\dfs\Applications\Altium\Datasheets\R0603_Tyco_RN73.pdf, LatestRevisionDate=13-Mar-08, Manufacturer Part Number=R0603_100R_0.1%_0.063W_10PPM, Mounted=Yes, Part Description="Thin Film Chip Resistor", Part Number=R0603_100R_0.1%_0.063W_10PPM, Pin Count=2, PressFit=No, Sense=No, SMD=Yes, Socket=No, Status="Not Recommended", TC=±10ppm
R16: library part R0603_10K_1%_0.1W_100PPM, "Resistor - 1%", Case=0603, Manufacturer=GENERIC, Manufacturer1 ComponentHeight=0.55mm, Manufacturer1 Example="NIC COMPONENT", Manufacturer1 Part Number=NRC06F1002TRF, Power=0.1W, Tolerance=±1%, Author="CERN DEM JLC", Component Type=Standard, CreateDate=03-Dec-07, HelpURL=\\cern.ch\dfs\Applications\Altium\Datasheets\R0603_NIC_NRC.pdf, LatestRevisionDate=13-Mar-08, Manufacturer Part Number=R0603_10K_1%_0.1W_100PPM, Mounted=Yes, Part Description="General Purpose Thick Film Chip Resistor", Part Number=R0603_10K_1%_0.1W_100PPM, Pin Count=2, PressFit=No, Sense=No, SMD=Yes, Socket=No, Status=Preferred, TC=±100ppm/°C
R17: library part R0603_1K_0.1%_0.063W_10PPM, "Resistor - 0.1%", Case=0603, Manufacturer=GENERIC, Manufacturer1 ComponentHeight=0.55mm, Manufacturer1 Example="TYCO HOLSWORTHY", Manufacturer1 Part Number=RN73C1J1K0BTG, Power=0.063W, Tolerance=±0.1%, Author="CERN DEM BC", Component Type=Standard, CreateDate=23-May-16, HelpURL=\\cern.ch\dfs\Applications\Altium\Datasheets\R0603_Tyco_RN73.pdf, LatestRevisionDate=23-May-16, Manufacturer Part Number=R0603_1K_0.1%_0.063W_10PPM, Mounted=Yes, Part Description="Thin Film Chip Resistor", Part Number=R0603_1K_0.1%_0.063W_10PPM, Pin Count=2, PressFit=No, Sense=No, SMD=Yes, Socket=No, Status="Not Recommended", TC=±10ppm
U1: library part CMP-0491-01503-1, "Micropower Inverting DC/DC Converter, 5-pin SOT23 (S5-5), -40 to 85 degC, Pb-Free, Mini Tape and Reel", Manufacturer="Linear Technology", ComponentLink1Description="Manufacturer URL", ComponentLink1URL=http://www.linear.com/, ComponentLink2Description=Datasheet, ComponentLink2URL=http://cds.linear.com/docs/en/datasheet/16171f.pdf, ComponentLink3Description="Package Specification", ComponentLink3URL=http://cds.linear.com/docs/en/datasheet/17278fb.pdf, Mounting Technology="Surface Mount", Number of Outputs=1, PackageDescription="5-Pin Plastic SOT-23, Body 1.625 x 2.90 mm, Pitch 0.95 mm", PackageReference=S5-5, PackageVersion=Aug-07, Packing="Mini Tape and Reel", PartNumber=LT1617ES5#TRMPBF, RoHS=TRUE
U2 U3 U5: library part CMP-04895-000300-1, "IC OPAMP GP 2 CIRCUIT 8VSSOP"
U4: "12-Bit Voltage Output DAC with Precision Internal Reference 1-LSB INL 10-Pin VSSOP T/R", Manufacturer="Texas Instruments", Supplier Part Number 1=296-DAC60501ZDGSRCT-ND, Category="Digital to Analog Converters (DACs)", Manufacturer Part Number=DAC60501ZDGSR, Pricing 1="1=2.86000, 10=2.57000, 25=2.42480, 100=2.06590, 250=1.93980, 500=1.69732, 1000=1.60125 (USD)", RoHS=Yes, RoHS Compliant=Yes, Stock 1=238, Supplier 1=Digi-Key
U6: library part CMP-0934-00050-1, "Low Gain Drift Precision Instrumentation Amplifier, Single Supply 4.6 to 36 V, -40 to 125 degC, 8-Pin SOIC (R-8), RoHS, Tube", Manufacturer="Analog Devices", Quiescent Current="0.85 mA Typ.", Temperature Range="-40 to 125 degC", -3dB Bandwidth="650 kHz Typ.", ComponentLink1Description="Manufacturer URL", ComponentLink1URL=http://www.analog.com/en/index.html, ComponentLink2Description=Datasheet, ComponentLink2URL=http://www.analog.com/static/imported-files/data_sheets/AD8228.pdf, ComponentLink3Description="Package Specification", ComponentLink3URL=http://www.analog.com/static/imported-files/packages/PKG_PDF/SOIC_Narrow%20(R)/R_8.pdf, DatasheetVersion="Rev. 0", Mounting Technology="Surface Mount", PackageDescription="8-Pin Small Outline Integrated Circuit, Body 4.9 x 3.9 mm, Pitch 1.27 mm", PackageVersion=Jun-06, Packing=Tube, PartNumber=AD8228ARZ, RoHS=TRUE, Slew Rate="2.5 V/us Typ.", VIO="90 uV Max.", VSS@Single Supply="4.6 to 36 V"

## Via types
v1: diameter 35.43, hole 11.81, Top Layer to Bottom Layer, tented both sides, 123 vias

## Nets (pads, with @x,y where several pads share a name; then routed paths per layer and width w, separated by ;. In a path a pad name is that pad's centre, name@x,y a point inside that pad or via, vN(x,y) a via of type N, cw(c..) or ccw(c..) an arc to the next point about the centre after c; other vN are vias at no path point)
3V3: 3V3.1 C2.2 C3.2 C4.2 C5.2 C6.2 C13.2 C14.2 J1.2 L1.1 R4.2 U1.4 U1.5 U2.8 U3.8 U4.1 U4.5 U5.8 U6.8 | length 1056.7
  Top Layer w10: C4.2 392.76,1006.5 400.63,1014.37 U4.1 ; U4.5 474.87,935.63 540.13,1000.89 540.13,1015.13 v1(545,1020)
  Top Layer w20: U3.8 623.31,1351.18 623.5,1351.38 C2.2 624.25,1430.75 624.25,1484.25 v1(625,1485) ; R4.2 766.5,998.03 789.53,975 v1(820,975) ; v1(1110,1510) 1109.76,1509.76 1109.76,1460.24 C14.2 1109.53,1391.2 1107.85,1389.53 U6.8 1108.21,1388.83 1187.66,1388.83 C6.2 v1(1190,1435) ; U2.8 1757.13,868.39 1769.02,856.5 C3.2 v1(1770,910) ; U5.8@1690,1351.25 v1(1690,1380) 1691.75,1381.75 1691.75,1428.25 C5.2
  Top Layer w30: v1(310,1030) 310.29,1029.71 335.8,1029.71 358.5,1007.01 C4.2@358.5,1006.52
  Bottom Layer w50: 85,705 J1.2@85,780.42
-3V3: -3V3.1 C7.2 C8.2 C9.2 C10.2 C11.2 C12.2 C17.2 C21.2 L2.2 R1.2 U2.4 U3.4 U5.4 U6.5 | length 1722.8
  Top Layer w10: R1.2 988.5,666.5 1217.72,437.28 -3V3.1@1217.72,222.28
  Top Layer w20: C9.2 434.25,1195.75 434.25,1239.25 v1(435,1240) 435,1243.11 445.64,1253.75 U3.4@445.64,1265 ; C10.2 1508.5,778.5 1510,780
  Top Layer w30: C11.2 R1.2 ; U6.5 1111.65,1239.53 1114.84,1236.34 1114.84,1179.69 C17.2 ; C21.2 1122.28,222.28 -3V3.1@1217.72,222.28 ; v1(1120,1125) 1119.76,1125.24 1119.76,1174.76 C17.2 ; v1(1190,1130) C7.2 1188.25,1176.75 1121.28,1176.75 C17.2 ; v1(1455,710) C10.2 ; v1(1460,1185) C8.2 1513.5,1248.5 1515,1250 1515,1255 1512.6,1257.4 U5.4@1510.32,1257.4
  other v1: 825,85 865,85 905,85 945,85 985,85 1025,85 1065,85 1105,85 825,130 865,130 905,130 945,130 985,130 1025,130 1065,130 1105,130 1025,175 1065,175 1105,175
A0_I2C: J1.5 U4.7 | length 500.8
  Top Layer w10: J1.5 195.89,974.11 220.89,974.11 315,880 495,880 570.32,955.32 U4.7
CH1_I: R11.2 U6.7 | length 777.8
  Top Layer w10: R11.2 990,865 1015,890 1015,1300 1054.53,1339.53 U6.7
CH1_V: R3.2 R13.2 U3.7 | length 348.9
  Top Layer w10: 636.5,1195 635,1196.5 635,1210 615,1230 580,1230 560,1250 560,1315.71 569.89,1325.59 U3.7 644.34,1325.59 646.18,1327.43 662.6,1327.43 689.02,1353.86 702.36,1353.86 R3.2
CH2_Voc: R5.2 R12.2 U2.1 | length 217
  Top Layer w10: R12.2 R5.2@1401.97,926.5 ; R5.2 R5.2@1401.97,926.5 ; U2.1 1458.11,868.39 1414.69,911.81 1414.69,913.78 R5.2@1401.97,926.5
CH3_Isc: C24.1 R9.2 R14.2 U5.7 | length 2184.1
  Top Layer w10: R9.2 990,780 1105,665 1815,665 1890,740 1890,1280 1851.61,1318.39 1680.27,1318.39 U5.7 1649.29,1317.8 1648.5,1318.58 1642.66,1318.58 1626.5,1334.75 R14.2 C24.1
GND: B1.1 B2.1 B3.1 B4.1 C2.1 C3.1 C4.1 C5.1 C6.1 C7.1 C8.1 C9.1 C10.1 C12.1 C13.1 C14.1 C15.1 C16.1 C17.1 C19.2 C21.1 C22.1 C23.1 D1.1 J1.10 J2.2 J2.4 J2.6 R2.1 R10.1 R16.1 U1.2 U2.5 U4.4 U5.3 U6.1 U6.6 | length 1797.4
  Top Layer w10: C4.1 371.81,955.32 U4.4
  Top Layer w20: C15.1 636.5,1095.98 683.31,1142.8 696.3,1142.8 706.75,1153.25 706.75,1150.73 714.69,1142.8 753.03,1142.8 760.82,1135 v1(765,1135) ; C22.1 v1(820,715) ; C16.1 775.15,921.35 798.65,921.35 v1(820,900) ; R10.1 v1(840,1400) ; v1@844.21,1395.79 845.46,1397.05 847.13,1397.05 854.65,1389.53 U6.1 ; v1@1060,1125 1060.47,1125.47 C17.1 ; U6.6 1134.09,1289.53 1140.69,1282.92 v1(1190,1282.92) ; C7.1 v1(1190,1282.92) ; C6.1 v1(1190,1282.92) ; C23.1 1320.75,734.25 1379.25,734.25 v1(1380,735) ; U2.5 1679.4,791.81 1768.31,791.81 C3.1 1770.75,794.25 1824.25,794.25 v1(1825,795)
  Top Layer w30: v1(305,980) 305.4,980 338.2,947.2 356.3,947.2 C4.1 ; C13.1 C13.1@489.76,389.76 ; v1@489.76,340.24 v1(490,340) 490,300 ; C9.1 496.5,1195.98 520,1219.49 v1(520,1250) ; 605,500 605,544.68 610.32,550 ; R2.1 v1(725,600) ; C2.1 v1(740,1430) ; v1(1025,1410) 1025.29,1410.29 1025.29,1434.81 C14.1 ; v1(1040,335) C12.1 1044.69,289.21 1054.06,289.21 1060.28,295.43 C21.1 v1(1120,350) ; C10.1 v1(1625,710) ; v1(1575,1240) 1575,1239.6 1576.5,1238.1 C8.1 R16.1 1649.71,1183.79 1649.71,1135.29 v1(1650,1135) ; C5.1 1756.5,1429.74 1760.2,1426.04 1808.96,1426.04 v1(1810,1425)
  other v1: 314.96,78.74 393.7,78.74 472.44,78.74 551.18,78.74 629.92,78.74 708.66,78.74 1496.06,78.74 1574.8,78.74 1653.54,78.74 354.33,157.48 1535.43,157.48 1614.17,157.48 1338.58,236.22 1574.8,236.22 354.33,314.96 1299.21,314.96 1377.95,314.96 1535.43,314.96 1614.17,314.96 1929.13,314.96 1023.62,393.7 1102.36,393.7 1181.1,393.7 1259.84,393.7 1338.58,393.7 1574.8,393.7 1653.54,393.7 1732.28,393.7 1811.02,393.7 1889.76,393.7 905.51,472.44 984.25,472.44 1062.99,472.44 1299.21,472.44 1377.95,472.44 1535.43,472.44 1614.17,472.44 1692.91,472.44 1771.65,472.44 1850.39,472.44 1929.13,472.44 629.92,551.18 787.4,551.18 866.14,551.18 944.88,551.18 1023.62,551.18 1181.1,551.18 1259.84,551.18 1338.58,551.18 1574.8,551.18 1653.54,551.18 1732.28,551.18 1811.02,551.18 1889.76,551.18 354.33,629.92 826.77,629.92 905.51,629.92 1141.73,629.92 1220.47,629.92 1299.21,629.92 1377.95,629.92 1535.43,629.92 1614.17,629.92 1692.91,629.92 1771.65,629.92 1850.39,629.92 1929.13,629.92 565,880 650,890 1058.71,1123.66 840,1135 360,1200
NetC1_1: C1.1 L1.2 U1.1
NetC1_2: C1.2 D1.2 L2.1
NetC11_1: C11.1 R1.1 R2.2 U1.3 | length 218.4
  Top Layer w10: C11.1 R1.1 ; U1.3 560,535.16 560,555 545,570 R1.1 ; R2.2 548.5,600 R1.1
NetC15_2: C15.2 J1.9 R13.1 | length 476.6
  Top Layer w10: J1.9 220,1150 548.5,1150 558.82,1160.31 560.79,1160.31 R13.1@573.5,1173.03 ; 573.5,1115.98 R13.1@573.5,1173.03 ; R13.1@573.5,1180 R13.1 R13.1@573.5,1173.03
NetC16_2: C16.2 J1.3 R11.1 | length 667.5
  Top Layer w10: J1.3 195,885 305,775 590,775 671.65,856.65 697.12,856.65 703.5,863.03 C16.2
NetC18_1: C18.1 R8.1 U3.2 | length 283.7
  Top Layer w10: C18.1 368.5,1303.5 390.59,1325.59 494.73,1325.59 500.59,1331.45 500.59,1409.41 496.22,1413.78 496.22,1427.28 R8.1@493.5,1430
NetC18_2: C18.2 R7.1 U3.1 | length 188.2
  Top Layer w10: R7.1 323.5,1372.99 C18.2 373.5,1366.5 388.82,1351.18 U3.1
NetC19_1: C19.1 U4.10 | length 141.6
  Top Layer w10: U4.10 612.05,1015.28 650.28,1015.28 700,1065 700,1083.5 C19.1 ; C19.1@709.13,1084.37 C19.1@713.5,1080
NetC20_1: C20.1 R15.1 R17.2 U5.1 | length 238.3
  Top Layer w10: R17.2 C20.1 ; R15.1 1422.44,1418.94 1422.44,1402.44 1409.34,1389.34 1409.34,1370.84 C20.1 ; U5.1@1483.39,1343.39 1456.61,1343.39 1438.5,1361.5 C20.1
NetC22_2: C22.2 J1.1 R9.1 | length 612.5
  Top Layer w10: J1.1 245,725 693.5,725 C22.2 R9.1
NetC23_2: C23.2 J1.4 R12.1 | length 1426.3
  Top Layer w10: J1.4 135,835 210,835 295,750 605,750 680,825 1255,825 1291.17,861.17 1317.67,861.17 R12.1 C23.2 1319.02,796.5 1305.31,810.2 C23.2@1305.31,811.18
NetC24_2: C24.2 R14.1 R15.2 U5.6 | length 340.4
  Top Layer w10: R15.2 R14.1 ; C24.2 R14.1 ; U5.6 1632.8,1292.2 1575,1350 1575,1418.5 R14.1
NetQ1_1: Q1.1 R7.2 | length 178
  Top Layer w10: R7.2 386.5,1476.5 447.76,1537.76 Q1.1
NetQ1_2: Q1.2 R8.2 R10.2 U6.4 | length 723.4
  Top Layer w10: R8.2 546.5,1466.5 567.4,1487.4 567.4,1538.19 574.21,1545 730,1545 780,1495 780,1310 811.17,1278.83 839.68,1278.83 845,1273.5 845,1250 855.47,1239.53 U6.4
NetR3_1: R3.1 U3.6 | length 101.5
  Top Layer w10: U3.6 711.5,1300 R3.1
NetR5_1: R5.1 U2.2 | length 118.4
  Top Layer w10: R5.1 1403.5,860 1430,860 1447.2,842.8 U2.2
NetR6_1: R6.1 U4.2 | length 149
  Top Layer w10: U4.2 479.69,994.68 496.5,1011.5 R6.1
NetR16_2: R16.2 U5.5 | length 94.8
  Top Layer w10: U5.5 1679.68,1218.79 1711.5,1186.97 R16.2
NetU2_6: U2.6 U2.7 | length 25.6
  Top Layer w10: U2.6 U2.7
SCL_I2C: J1.6 U4.6 | length 670.7
  Top Layer w10: J1.6 135,935 215,935 315,835 580,835 611.14,866.14 U4.6
SDA_I2C: J1.8 R4.1 U4.8 | length 756.9
  Top Layer w10: J1.8 135,1035 230,1035 260,1005 260,973.28 328.28,905 480,905 550,975 U4.8 680.47,975 703.5,998.03 R4.1 R4.1@700.15,1003.35
Solar1+: CH1_V.1 J2.5 Q1.3 U3.5 | length 1646.5
  Top Layer w10: Q1.3 530.8,1631.45 888.55,1631.45 985,1535 985,1225 960,1200 751.27,1200 676.86,1274.41 U3.5
  Top Layer w15: Q1.3 CH1_V.1@530,1720 ; CH1_V.1@540,1720 755,1720 J2.5
  Top Layer w20: CH1_V.1 CH1_V.1@540,1720
Solar2+: J2.3 U2.3 | length 1475.7
  Top Layer w15: J2.3@1035,1810 1036.27,1808.73 1036.27,1758.73 1080,1715 1205,1715 1255,1665 1255,1115 1320,1050 1525,1050 1585,990 1585,840 1562.2,817.2 U2.3
Solar3+: C20.2 J2.1 R17.1 U5.2 | length 761.9
  Top Layer w15: J2.1 1320,1715 1320,1420 1290,1390 1290,1325 1306.28,1308.72 1324.78,1308.72 R17.1 C20.2 1443.5,1298.5 1462.8,1317.8 U5.2
VIN: J1.7 R6.2 U3.3 VIN.1 | length 752.1
  Top Layer w10: R6.2 VIN.1 340,1085 J1.7 135,1135 135,1220 165,1250 355,1250 404.21,1299.21 414.46,1299.21 415.25,1300 U3.3
pads on no net: U4.3 U4.9 U6.2 U6.3

## Polygon pours and split planes (outlines as drawn)
GND on Top Layer "GND_L01_P005" (solid, remove dead copper, pour order 5): 0,0 1968.5,0 1968.5,1968.5 0,1968.5
GND on Top Layer "GND_L01_P000" (hatched 45Degree grid 20 track 8, remove dead copper, pour order 0): 1968.5,0 1968.5,1968.5 0,1968.5 0,0
3V3 on Bottom Layer "3V3_L02_P004" (solid, remove dead copper, pour order 4): 775,965 778.63,965 808.63,995 836.53,995 845.57,985.96 845.57,960.57 810,925 405,925 305,825 305,685 265,645 160,645 80,645 60,665 60,735 110,735 160,685 240,685 260,705 260,840 340,920 340,1000 330,1010 295,1010 255,1050 255,1460 300,1505 1060,1505 1090,1535 1125,1535 1215,1445 1655,1445 1720,1380 1800,1300 1800,905 1785.01,890.01 1759.99,890.01 1745,905 1745,1270 1610,1405 1185,1405 1125,1465 325,1465 305,1445 305,1310 305,1070.39 325.39,1050 360,1050 380,1030 380,985 400,965 470,965 510,965 520,975 520,1031.53 534.3,1045.83 555.7,1045.83 572.72,1028.81 572.72,977.28 585,965 595,965
-3V3 on Bottom Layer "-3V3_L02_P003" (solid, remove dead copper, pour order 3): 510,1220 480,1220 450,1250 425,1250 420,1245 420,1199.99 444.99,1175 1025,1175 1100,1100 1400,1100 1430,1070 1430,234.42 1395.58,200 815,200 795,180 795,80 810,65 1410,65 1490,145 1490,1190 1460,1220
GND on Bottom Layer "GND_L02_P006" (solid, remove dead copper, pour order 6): 0,0 1968.5,0 1968.5,1968.5 0,1968.5

## Other copper
Top Layer:
  region net 3V3: 480,515 455,515 445,505 445,485 455,475 480,475 480,445 450,415 450,255 460,245 735,245 735,175 700,140 440,140 390,190 390,375 350,415 95,415 45,465 45,800 65,820 110,820 135,795 135,580 170,545 480,545
  pour cut-out: 810,540 825,525 825,455 615,455 585,485 575,485 575,510 615,510 645,540
  region net GND: 635,510 620,510 620,535 624.61,539.61 694.61,539.61 695,540 695,565 605,565 590,550 590,505 635,505
  region net NetC1_2: 788.54,294.8 790,296.26 790,380 775,395 775,445 805,475 805,520 845,520 845,395 862.52,377.48 946.02,377.48 981.46,342.05 981.46,294.8
  region net GND: 540,485 615,485 625,475 695,475 710,490 710,510 700,520 655,520 645,510 540,510
  region net -3V3: 788.54,243.62 785,240.08 785,80 805,60 1125,60 1150,85 1150,243.62
  region net NetC1_1: 528.54,295.59 530,297.05 530,470 580,470 605,445 745,445 745,295 744.41,295.59

## Silkscreen, mask and mechanical layers (free items; w line width, h text height)
Top Overlay:
  drawing of 19 lines, arcs and shapes, not listed
  text "PoliSpace" at 1325,1865 h39.37
  text "6S" at 1440,1795 h39.37
  text "CubeSat" at 1350,1735 h39.37
  text "EPS Team" at 1330,1665 h39.37
  text "VCH1" at 155.91,1570.91 h31.5
  text "-" at 60.91,1570.16 h31.5
  text "SP1-" at 757.13,1517.87 h39.37 r90
  text "SP1+" at 852.13,1517.87 h39.37 r90
  text "SP2-" at 957.13,1512.87 h39.37 r90
  text "SP2+" at 1052.13,1512.87 h39.37 r90
  text "SP3-" at 1152.13,1512.87 h39.37 r90
  text "SP3+" at 1252.13,1512.87 h39.37 r90
  text "SDA" at 55.91,1495.91 h31.5
  text "VIN" at 180.91,1495.91 h31.5
  text "SCL" at 55.91,1420.91 h31.5
  text "A0" at 205.91,1420.91 h31.5
  text "VOC" at 55.91,1345.91 h31.5
  text "ICH1" at 160.91,1345.91 h31.5
  text "+" at 60.91,1270.66 h31.5
  text "ISC" at 180.91,1270.91 h31.5
  text "JLCJLCJLCJLC" at 1932.13,822.87 h39.37 r90
Outline:
  lines w10: 0.02,205.14 0.03,1768.52 cw(c196.84,1771.67) 204.98,1968.33 ; 0.16,204.99 ccw(c196.85,196.85) 200,0.02 1763.37,0.02 ; 205.14,1968.49 1768.5,1968.49 cw(c1771.65,1771.65) 1968.34,1763.51 ; 1763.51,0.16 ccw(c1771.65,196.85) 1968.49,200 1968.49,1763.37 ; 204.98,1968.33 204.99,1968.34

## Dimensions
1970,1710 to 0.02,205.14 on Mechanical 13
200,1970 to 200,0.02 on Mechanical 13

## Text inside footprints (layer, text, board x,y; h text height)
J1: Top Overlay "1" at 206.57,694.37 h47.24 r90
J2: Top Overlay "6" at 750,1730 h39.37 r180; Top Overlay "4" at 950,1730 h39.37 r180; Top Overlay "1" at 1240,1730 h39.37 r180; Top Overlay "2" at 1150,1730 h39.37 r180; Top Overlay "3" at 1050,1730 h39.37 r180; Top Overlay "5" at 850,1730 h39.37 r180